# EAGLE board EECS300pcb (EAGLE 9.6.2)
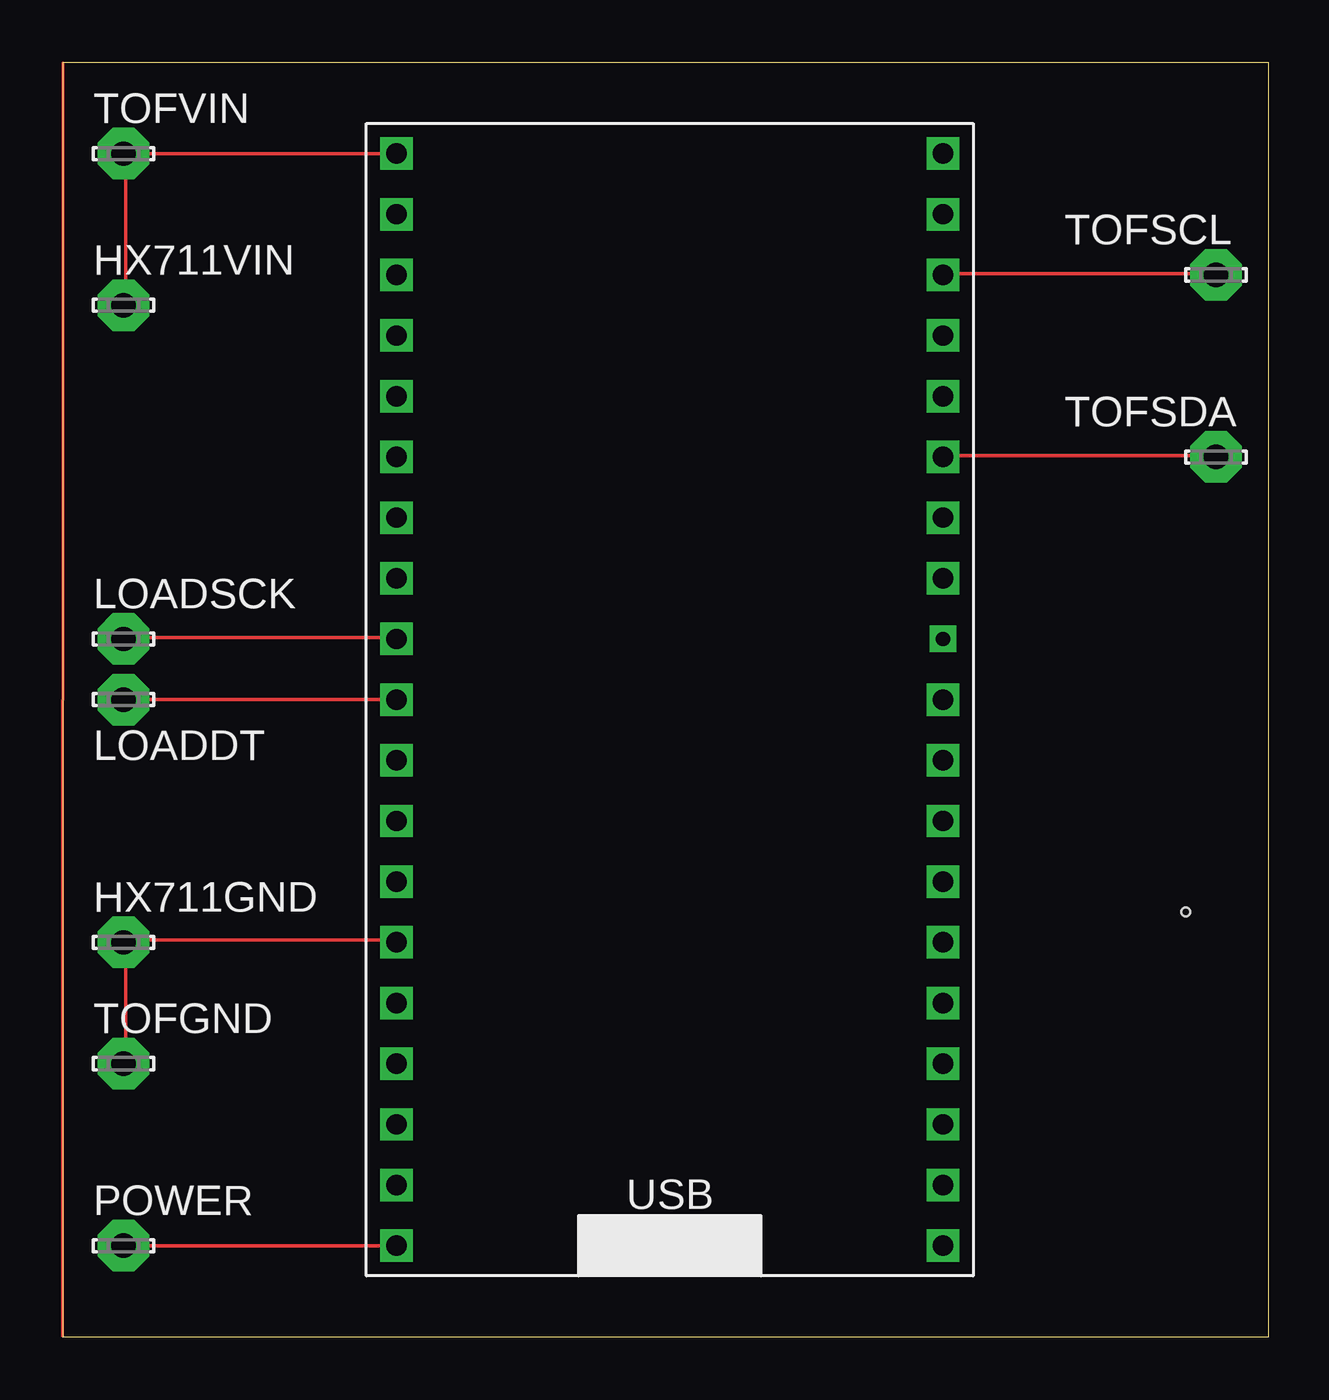
[diagram p0: board, top side]

Size 50.47 x 53.33 mm. Coordinates in mm from the lower left corner, seen from the top.
Outline: 0,0 50.47,0 50.47,53.33 0,53.33 0,0
Copper layers (1*16): Top 0.035mm / dielectric 1.5mm / Bottom 0.035mm
Design rules "default": minimum track width 6mil, minimum drill 0.35mm, track to track 6mil, track to pad 6mil, pad to pad 6mil, via to via 6mil, smd to smd 6mil, copper to edge 40mil, drill to drill 6mil, minimum pad ring 10mil, minimum via ring 8mil, stop-mask expansion 4mil, vias tented up to drill 0mil, thermal gap 10mil
Holes 0.35 mm at 46.99,17.78

## Footprints (pad centres in the part's own frame; a part is rotated, then mirrored left to right if it is on the bottom)
LSP10 = drill 1.016 pad 2.159 octagon: MP 0,0
ESP32 = drill 0.85 square: 3.3V 1.27,46.99; 5V 1.27,1.27; EN 1.27,44.45; GND1 1.27,13.97; GND2 24.13,46.99; GND3 24.13,31.75; GPIO0 24.13,13.97; GPIO2 24.13,11.43; GPIO4 24.13,16.51; GPIO5 24.13,24.13; GPIO6 24.13,1.27; GPIO7 24.13,3.81; GPIO8 24.13,6.35; GPIO9 1.27,8.89; GPIO10 1.27,6.35; GPIO11 1.27,3.81; GPIO12 1.27,16.51; GPIO13 1.27,11.43; GPIO14 1.27,19.05; GPIO15 24.13,8.89; GPIO16 24.13,19.05; GPIO17 24.13,21.59; GPIO19 24.13,29.21; GPIO21 24.13,34.29; GPIO22 24.13,41.91; GPIO23 24.13,44.45; GPIO25 1.27,26.67; GPIO26 1.27,24.13; GPIO27 1.27,21.59; GPIO32 1.27,31.75; GPIO33 1.27,29.21; GPIO34 1.27,36.83; GPIO35 1.27,34.29; GPIO36 1.27,41.91; GPIO39 1.27,39.37; RX 24.13,36.83; TX 24.13,39.37 | drill 0.6 square: GPIO18 24.13,26.67

## Placement (x,y rotation side)
HX711GND  LSP10  [LSP10]  2.54,16.51 0 top
HX711VIN  LSP10  [LSP10]  2.54,43.18 0 top
LOADDT  LSP10  [LSP10]  2.54,26.67 0 top
LOADSCK  LSP10  [LSP10]  2.54,29.21 0 top
POWER  LSP10  [LSP10]  2.54,3.81 0 top
TOFGND  LSP10  [LSP10]  2.54,11.43 0 top
TOFSCL  LSP10  [LSP10]  48.26,44.45 0 top
TOFSDA  LSP10  [LSP10]  48.26,36.83 0 top
TOFVIN  LSP10  [LSP10]  2.54,49.53 0 top
U$2  ESP32  [ESP32]  12.7,2.54 0 top

## Library data of the parts
HX711GND HX711VIN LOADDT LOADSCK POWER TOFGND TOFSCL TOFSDA TOFVIN = solpad; OC_NEWARK: unknown
U$2 = ESP32; OC_NEWARK: unknown

## Nets
N$1: HX711VIN.MP TOFVIN.MP U$2.3.3V
N$3: LOADSCK.MP U$2.GPIO25
N$4: LOADDT.MP U$2.GPIO26
N$5: HX711GND.MP TOFGND.MP U$2.GND1
N$7: POWER.MP U$2.5V
N$8: TOFSCL.MP U$2.GPIO22
N$9: TOFSDA.MP U$2.GPIO21

## Tracks (layer width: path | path; a pad name or v marks a point on that pad's centre or on a via)
N$1
  Top 0.152: 2.64,49.53 U$2.3.3V | 2.64,49.53 2.64,43.28 HX711VIN.MP | 2.64,49.53 TOFVIN.MP
N$3
  Top 0.152: U$2.GPIO25 13.92,29.26 2.64,29.26 LOADSCK.MP
N$4
  Top 0.152: LOADDT.MP U$2.GPIO26
N$5
  Top 0.152: U$2.GND1 13.92,16.61 2.64,16.61 HX711GND.MP 2.64,16.46 2.64,11.43 TOFGND.MP
N$7
  Top 0.152: POWER.MP U$2.5V
N$8
  Top 0.152: U$2.GPIO22 36.93,44.5 48.21,44.5 TOFSCL.MP
N$9
  Top 0.152: U$2.GPIO21 36.93,36.88 48.21,36.88 TOFSDA.MP
(copper drawn outside any net)
  shapes: Top area x1